# Altium PCB test.PcbDoc
Units mm, origin at the board's own origin, x right, y up, seen from the top; angles counter-clockwise.
Board outline 100 x 80.68 mm, 2 copper layers (Top Layer, Bottom Layer), stack 1.57 mm thick; 99 components, 63 nets, 333 pads, 0 vias.
Unrouted connection lines stored in the file: 212.
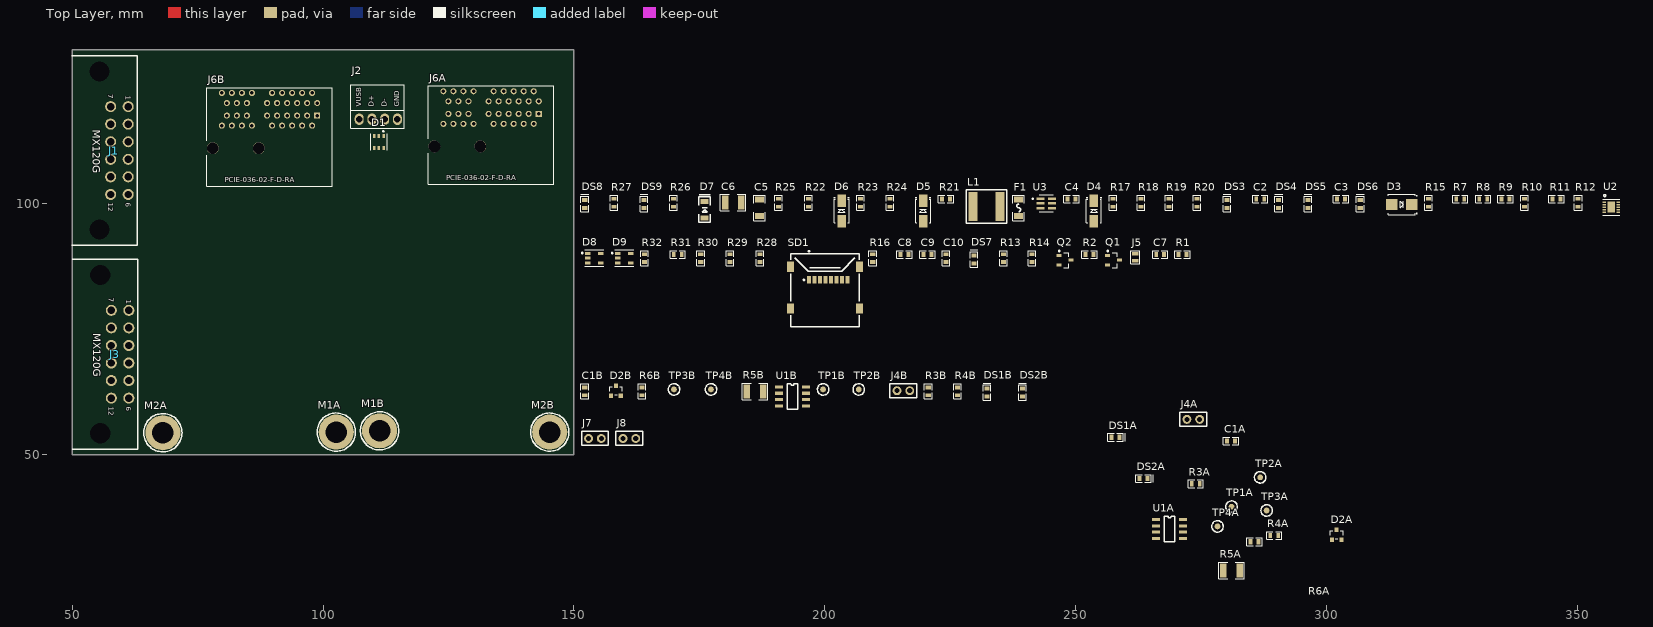
[diagram p0: Top Layer view]
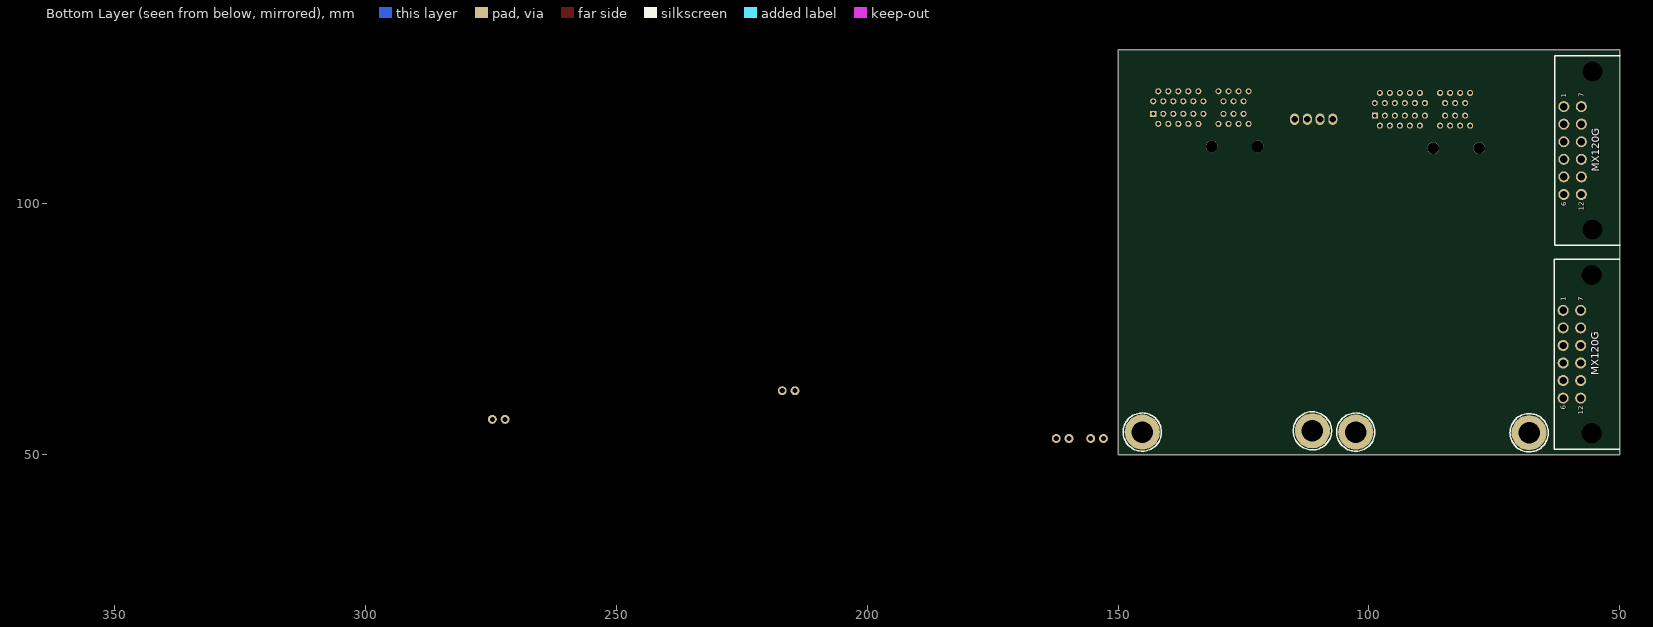
[diagram p1: Bottom Layer view, seen from below]

## Layer stack, top to bottom
Top Solder: solder mask 0.0102, Solder Resist, Dk 3.5
Top Layer: signal copper 0.0356
Dielectric 1: core 1.4986, Core-043, Dk 4.3
Bottom Layer: signal copper 0.0356
Bottom Solder: solder mask 0.0102, Solder Resist, Dk 3.5

## Board outline
50,50 150,50 150,130.683 50,130.683

## Design rules (kind name [scope] priority, off if disabled: settings)
Clearance [All] p1: gap=0.254 ignorepadtopadclearanceinfootprint=FALSE except(0: Arc-Hole Track-Hole SMDPad-Hole THPad-Hole Via-Hole Fill-Hole Poly-Hole Region-Hole Text-Hole)
PolygonConnect [All] p1: connectstyle=Relief reliefconductorwidth=0.254 reliefentries=4 polygonreliefangle="90 Angle" airgapwidth=0.254
RoutingVias [All] p1: holewidth=0.711 width=1.27 viastyle="Through Hole" minholewidth=0.711 minwidth=1.27 maxholewidth=0.711 maxwidth=1.27
SolderMaskExpansion [All] p1: expansion=0.102 istentingtop=FALSE
Width [All] p1: maxlimit=0.254 minlimit=0.254 preferedwidth=0.254
30 further rules are at their usual default settings.

## Classes and differential pairs
channel class RADC-ModuleConnect-S07-V00: "Card Module A" "Card Module B"
channel class RADC-CANBUS-S03-V00: CANBUS1 CANBUS2
component class CANBUS2: C1B D2B DS1B DS2B J4B R3B R4B R5B R6B TP1B TP2B TP3B TP4B U1B
component class CANBUS1: C1A D2A DS1A DS2A J4A R3A R4A R5A R6A TP1A TP2A TP3A TP4A U1A
component class "SD Card / LEDs / Screen": C7 C8 C9 C10 D8 D9 DS7 J5 Q1 Q2 R1 R2 R13 R14 R16 R28 R29 R30 R31 R32 SD1
component class "Power Supply": C2 C3 C4 C5 C6 D3 D4 D5 D6 D7 DS3 DS4 DS5 DS6 DS8 DS9 F1 L1 R7 R8 R9 R10 R11 R12 R15 R17 R18 R19 R20 R21 R22 R23 R24 R25 R26 R27 U2 U3
component class "Card Module B": J6B M1B M2B
component class "Card Module A": J6A M1A M2A
component class Connectors: D1 J1 J2 J3 J7 J8

## Components (designator, comment, footprint, x,y, rotation, side; value= is the part's Value field where it differs from the comment)
C1A "100nF 100V" Cap_Ceramic_0603 280.924,52.705 r0 top (schematic designator C1)
C1B "100nF 100V" Cap_Ceramic_0603 152.146,62.611 r90 top (schematic designator C1)
C2 "4u7" Cap_Ceramic_0603 286.766,100.965 r0 top
C3 "4u7" Cap_Ceramic_0603 302.895,100.965 r0 top
C4 "100nF 50V" Cap_Ceramic_0603 249.174,100.965 r0 top
C5 "22uF 35V" Cap_Ceramic_1206 186.944,99.187 r90 top
C6 "47uF 16V 1210" Cap_Ceramic_1210 181.737,100.203 r0 top
C7 "100nF" Cap_Ceramic_0603 266.827,89.916 r0 top
C8 "4u7" Cap_Ceramic_0603 215.9,89.916 r0 top
C9 "1uF" Cap_Ceramic_0603 220.472,89.916 r0 top
C10 "100nF" Cap_Ceramic_0603 224.155,89.154 r90 top
D1 "PRTR5V0U4D" SC-47 111.125,112.268 r270 top
D2A "NUP2105L" NUP2105L 302.006,34.036 r0 top (schematic designator D2)
D2B "NUP2105L" NUP2105L 158.369,62.738 r0 top (schematic designator D2)
D3 "SMBJ15CA" SMB 314.96,99.822 r0 top
D4 "B260A-13-F" SMA 253.619,98.552 r90 top
D5 "B260A-13-F" SMA 219.583,98.552 r90 top
D6 "B260A-13-F" SMA 203.327,98.552 r90 top
D7 "BZT52B3V3-G3-08" SOD123 176.022,98.806 r90 top
D8 "ESDS314" SOT-23-5 154.051,89.154 r0 top
D9 "ESDS314" SOT-23-5 160.02,89.154 r0 top
DS1A "LED Blue 0603" "LED BLUE 0603" 257.937,53.467 r0 top (schematic designator DS1)
DS1B "LED Blue 0603" "LED BLUE 0603" 232.283,62.357 r90 top (schematic designator DS1)
DS2A "LED Blue 0603" "LED BLUE 0603" 263.525,45.212 r0 top (schematic designator DS2)
DS2B "LED Blue 0603" "LED BLUE 0603" 239.395,62.357 r90 top (schematic designator DS2)
DS3 "LED Green 0603" "LED GREEN 0603" 280.162,99.949 r90 top
DS4 "LED Red 0603" "LED RED 0603" 290.449,99.949 r90 top
DS5 "LED Red 0603" "LED RED 0603" 296.291,99.949 r90 top
DS6 "LED Green 0603" "LED GREEN 0603" 306.705,99.949 r90 top
DS7 "LED Blue 0603" "LED BLUE 0603" 229.743,88.9 r90 top
DS8 "LED Green 0603" "LED GREEN 0603" 152.146,99.949 r90 top
DS9 "LED Green 0603" "LED GREEN 0603" 163.957,99.949 r90 top
F1 "0ZCJ0050FF2G" "1206 Fuse" 238.633,99.187 r90 top
J1 "MX120G" MX120G 61.158,110.604 r270 top
J2 "4PinMaleHeader" USBHEADER-TH 110.998,116.84 r0 top
J3 "MX120G" MX120G 61.285,70.005 r270 top
J4A "Jumper 2Way Pins" Jumper_2Way_Pin 274.701,57.023 r0 top (schematic designator J4)
J4B "Jumper 2Way Pins" Jumper_2Way_Pin 216.916,62.738 r0 top (schematic designator J4)
J5 "Jumper 2Way Solderable" Jumper_2Way_Solderable 261.874,88.646 r0 top
J6A "PCIE-036-02-F-D-RA" PCIE-036-02-F-D-RA 133.477,113.665 r0 top (schematic designator J6)
J6B "PCIE-036-02-F-D-RA" PCIE-036-02-F-D-RA 89.321,113.32 r0 top (schematic designator J6)
J7 "Jumper 2Way Pins" Jumper_2Way_Pin 155.448,53.213 r0 top
J8 "Jumper 2Way Pins" Jumper_2Way_Pin 162.306,53.213 r0 top
L1 "74404064221" Inductor_6x6mm 232.156,99.441 r0 top
M1A "Keystone 24883" "Keystone 24883" 102.616,54.483 r180 top (schematic designator M1)
M1B "Keystone 24883" "Keystone 24883" 111.252,54.737 r180 top (schematic designator M1)
M2A "Keystone 24883" "Keystone 24883" 68.072,54.356 r180 top (schematic designator M2)
M2B "Keystone 24883" "Keystone 24883" 145.161,54.483 r180 top (schematic designator M2)
Q1 "2N7002" SOT23-3 257.556,88.773 r0 top
Q2 "2N7002" SOT23-3 247.904,88.773 r0 top
R1 "100k" Res_ThinFilm_0603 271.272,89.916 r0 top
R2 "220R" Res_ThinFilm_0603 252.73,89.916 r0 top
R3A "1k" Res_ThinFilm_0603 273.926,44.183 r0 top (schematic designator R3)
R3B "1k" Res_ThinFilm_0603 220.599,62.611 r90 top (schematic designator R3)
R4A "1k" Res_ThinFilm_0603 289.56,33.909 r0 top (schematic designator R4)
R4B "1k" Res_ThinFilm_0603 226.441,62.611 r90 top (schematic designator R4)
R5A "120R 1% 1210" Res_ThinFilm_1210 281.051,26.924 r0 top (schematic designator R5)
R5B "120R 1% 1210" Res_ThinFilm_1210 186.055,62.611 r0 top (schematic designator R5)
R6A "10k" Res_ThinFilm_0603 285.623,32.639 r0 top (schematic designator R6)
R6B "10k" Res_ThinFilm_0603 163.576,62.611 r90 top (schematic designator R6)
R7 "4k7" Res_ThinFilm_0603 326.644,100.965 r0 top
R8 "2M2" Res_ThinFilm_0603 331.216,100.965 r0 top
R9 "2M2" Res_ThinFilm_0603 335.661,100.965 r0 top
R10 "4k7" Res_ThinFilm_0603 339.471,100.203 r90 top
R11 "4k7" Res_ThinFilm_0603 345.821,100.965 r0 top
R12 "4k7" Res_ThinFilm_0603 350.139,100.203 r90 top
R13 "1k" Res_ThinFilm_0603 235.585,89.154 r90 top
R14 "10k" Res_ThinFilm_0603 241.3,89.154 r90 top
R15 "220R" Res_ThinFilm_0603 320.294,100.203 r90 top
R16 "220R" Res_ThinFilm_0603 209.55,89.154 r90 top
R17 "390k" Res_ThinFilm_0603 257.429,100.203 r90 top
R18 "220k" Res_ThinFilm_0603 263.017,100.203 r90 top
R19 "1k2" Res_ThinFilm_0603 268.605,100.203 r90 top
R20 "150k" Res_ThinFilm_0603 274.193,100.203 r90 top
R21 "100k" Res_ThinFilm_0603 224.155,100.965 r0 top
R22 "1k" Res_ThinFilm_0603 196.723,100.203 r90 top
R23 "64k9" Res_ThinFilm_0603 207.137,100.203 r90 top
R24 "1k" Res_ThinFilm_0603 212.979,100.203 r90 top
R25 "220R" Res_ThinFilm_0603 190.754,100.203 r90 top
R26 "1k" Res_ThinFilm_0603 169.799,100.203 r90 top
R27 "19k6" Res_ThinFilm_0603 157.988,100.203 r90 top
R28 "220R" Res_ThinFilm_0603 187.071,89.154 r90 top
R29 "220R" Res_ThinFilm_0603 181.102,89.154 r90 top
R30 "220R" Res_ThinFilm_0603 175.26,89.154 r90 top
R31 "220R" Res_ThinFilm_0603 170.688,89.916 r0 top
R32 "220R" Res_ThinFilm_0603 164.084,89.154 r90 top
SD1 "47219-2001" 47219-2001 200.016,83.286 r0 top
TP1A "TestPoint_SMD" TestPointSMD 281.051,39.624 r0 top (schematic designator TP1)
TP1B "TestPoint_SMD" TestPointSMD 199.644,62.992 r90 top (schematic designator TP1)
TP2A "TestPoint_SMD" TestPointSMD 286.766,45.466 r0 top (schematic designator TP2)
TP2B "TestPoint_SMD" TestPointSMD 206.756,62.992 r90 top (schematic designator TP2)
TP3A "TestPoint_SMD" TestPointSMD 288.036,38.862 r0 top (schematic designator TP3)
TP3B "TestPoint_SMD" TestPointSMD 169.926,62.992 r90 top (schematic designator TP3)
TP4A "TestPoint_SMD" TestPointSMD 278.257,35.687 r0 top (schematic designator TP4)
TP4B "TestPoint_SMD" TestPointSMD 177.292,62.992 r90 top (schematic designator TP4)
U1A "SN65HVD233" SN65HVD233DR 268.699,35.181 r0 top (schematic designator U1)
U1B "SN65HVD233" SN65HVD233DR 193.548,61.595 r0 top (schematic designator U1)
U2 "MAX17612A" "10-Pin TDFN EP" 356.743,99.314 r0 top
U3 "LMR14010" LMR14010 244.094,100.076 r0 top

## Footprints (in the part's own frame and the unit in brackets; to place one, negate y for a bottom-side part, rotate by r counter-clockwise, add the part's x,y. Pads: shape width x height; smd on the part's side, far side on the other; paste and mask are expansions set on the pad)
"10-Pin TDFN EP" [mm]
  rect 0.7x0.25 smd: 1(-1.425,1) 2(-1.425,0.5) 3(-1.425,0) 4(-1.425,-0.5) 5(-1.425,-1) 6(1.425,-1) 7(1.425,-0.5) 8(1.425,0) 9(1.425,0.5) 10(1.425,1)
  rect 1.5x2.2 smd paste-0.1: 11(0,0)
  silkscreen extent -1.7,-1.6 1.7,2.5, body extent -1.51,-1.5 1.51,1.5, height 0.76
"1206 Fuse" [mil]
  rect 47x71 smd: 1(-66.08,0) 2(66.08,0)
  silkscreen extent -100,-45 100,45, body extent -67,-33 67,33, height 28
47219-2001 [mm]
  rect 0.8x1.5 smd: 1(-3.205,1.55) 2(-2.105,1.55) 3(-1.005,1.55) 4(0.095,1.55) 5(1.195,1.55) 6(2.295,1.55) 7(3.395,1.55) 8(4.495,1.55)
  rect 1.45x2 smd: 9(6.875,4.15) 10(6.875,-4.15) 11(-6.875,-4.15) 12(-6.875,4.15)
  silkscreen extent -6.8,-7.8 6.8,7.36, body extent -7.3,-7.79 7.3,6.71, height 1.91
Cap_Ceramic_0603 [mil]
  rect 30x40 smd: 1(-31.24,0) 2(31.24,0)
  silkscreen extent -60,-30 60,30, body extent -31,-16 32,16, height 33
Cap_Ceramic_1206 [mil]
  rect 47x71 smd: 1(-66.08,0) 2(66.08,0)
  silkscreen extent -100,-45 100,45, body extent -63,-31 63,32, height 53
Cap_Ceramic_1210 [mm]
  rect 1.3x2.8 smd: 1(-1.625,0) 2(1.625,0)
  silkscreen extent -2.54,-1.65 2.54,1.65, body extent -1.6,-1.25 1.6,1.25, height 1.35
Inductor_6x6mm [mm]
  rect 1.8x5.7 smd: 1(-2.667,0) 2(2.794,0)
  silkscreen extent -3.94,-3.3 4.06,3.3, body extent -3,-3 3,3, height 4.56
Jumper_2Way_Pin [mil]
  round 70 hole 40: 1(-100,0) 2(0,0)
  silkscreen extent -155,-55 55,55, body extent -142,-48 42,47, height 332
Jumper_2Way_Solderable [mil]
  rect 50x30 smd: 1(0,55) 2(0,0)
  silkscreen extent -35,-25 35,80
"Keystone 24883" [mm]
  round 7 hole 4.3: 1(0,0)
  silkscreen extent -3.81,-3.81 3.81,3.81, body extent -2.78,-2.78 2.78,2.78, height 4.02
"LED BLUE 0603" [mil]
  rect 30x40 smd: 1(-31.24,0) 2(31.24,0)
  silkscreen extent -60,-30 75,30, body extent -40,-20 40,20, height 30
"LED GREEN 0603" [mil]
  rect 30x40 smd: 1(-31.24,0) 2(31.24,0)
  silkscreen extent -60,-30 75,30, body extent -40,-20 40,20, height 30
"LED RED 0603" [mil]
  rect 30x40 smd: 1(-31.24,0) 2(31.24,0)
  silkscreen extent -60,-30 75,30, body extent -40,-20 40,20, height 30
LMR14010 [mil]
  rect 65x20 smd: 1(-44.73,36.75) 2(-44.73,-0.65) 3(-44.73,-38.05) 4(45.84,-38.05) 5(45.84,-0.65) 6(45.84,36.75)
  silkscreen extent -110,-68 56,66, body extent -55,-58 56,56, height 43
MX120G [mm]
  round 2.2 hole 1.45: 1(-8.75,0) 2(-5.25,0) 3(-1.75,0) 4(1.75,0) 5(5.25,0) 6(8.75,0) 7(-8.75,-3.5) 8(-5.25,-3.5) 9(-1.75,-3.5) 10(1.75,-3.5) 11(5.25,-3.5) 12(8.75,-3.5)
  round 0 hole 4 mask+0.254: NC(-15.75,-5.7) NC(15.75,-5.7)
  silkscreen extent -18.9,-11.25 18.9,1.8, body extent -18.78,-32.1 18.58,0.36, height 24.48
NUP2105L [mm]
  rect 0.8x0.9 smd: 1(-0.95,-1) 2(0.95,-1) 3(0,1)
  silkscreen extent -1.27,-0.76 1.27,0.76, body extent -1.45,-1.22 1.45,1.18, height 1
PCIE-036-02-F-D-RA [mm]
  rect 1.208x1.208 hole 0.7: A01(9.5,4.25)
  round 1.208 hole 0.7: A02(8.5,2.25) A03(7.5,4.25) A04(6.5,2.25) A05(5.5,4.25) A06(4.5,2.25) A07(3.5,4.25) A08(2.5,2.25) A09(1.5,4.25) A10(0.5,2.25) A11(-0.5,4.25) A12(-3.5,2.25) A13(-4.5,4.25) A14(-5.5,2.25) A15(-6.5,4.25) A16(-7.5,2.25) A17(-8.5,4.25) A18(-9.5,2.25) B01(9.5,6.75) B02(8.5,8.75) B03(7.5,6.75) B04(6.5,8.75) B05(5.5,6.75) B06(4.5,8.75) B07(3.5,6.75) B08(2.5,8.75) B09(1.5,6.75) B10(0.5,8.75) B11(-0.5,6.75) B12(-3.5,8.75) B13(-4.5,6.75) B14(-5.5,8.75) B15(-6.5,6.75) B16(-7.5,8.75) B17(-8.5,6.75) B18(-9.5,8.75)
  round 2.35 hole 2.35 unplated: ""(-11.3,-2.25) ""(-2.15,-2.25)
  silkscreen extent -12.5,-9.8 12.5,9.8, body extent -12.49,-9.78 12.51,9.07, height 9.49
Res_ThinFilm_0603 [mil]
  rect 30x40 smd: 1(-31.24,0) 2(31.24,0)
  silkscreen extent -60,-30 60,30, body extent -31,-16 32,16, height 18
Res_ThinFilm_1210 [mm]
  rect 1.3x2.8 smd: 1(-1.625,0) 2(1.625,0)
  silkscreen extent -2.54,-1.65 2.54,1.65, body extent -1.6,-1.25 1.6,1.25, height 0.6
SC-47 [mm]
  rect 0.8x0.5 smd: 1(-1.2,0.95) 2(-1.2,0) 3(-1.2,-0.95) 4(1.2,-0.95) 5(1.2,0) 6(1.2,0.95)
  silkscreen extent -2.29,-1.65 1.65,1.65, body extent -1.3,-1.45 1.3,1.45, height 1.14
SMA [mm]
  rect 2.5x1.7 smd: A(-2,0) K(2,0)
  silkscreen extent -2.3,-1.52 2.67,1.52, body extent -2.52,-1.46 2.52,1.46, height 2.4
SMB [mm]
  rect 2.26x2.16 smd: A(-2,0) K(2,0)
  silkscreen extent -2.67,-2.01 3.05,2.03, body extent -2.75,-1.95 2.75,1.95, height 2.45
SN65HVD233DR [mm]
  rect 1.55x0.6 smd: 1(-2.7,1.903) 2(-2.7,0.633) 3(-2.7,-0.637) 4(-2.7,-1.907) 5(2.7,-1.907) 6(2.7,-0.637) 7(2.7,0.633) 8(2.7,1.903)
  silkscreen extent -1.04,-2.54 1.04,2.54, body extent -3.01,-2.45 3.01,2.45, height 1.63
SOD123 [mil]
  rect 40x60 smd: A(-65,0) K(65,0)
  silkscreen extent -100,-45 118,45, body extent -74,-33 74,33, height 47
SOT23-3 [mm] "SOT23, 3-Leads, Body 2.90x2.45mm, Pitch 0.95mm, IPC Medium Density"
  rect 1x0.6 smd: D(1.2,0) G(-1.2,0.95) S(-1.2,-0.95)
  silkscreen extent -1.32,-1.5 0.7,1.92, body extent -1.3,-1.5 1.3,1.5, height 1.1
SOT-23-5 [mm]
  rect 1.1x0.6 smd: 1(-1.3,0.95) 2(-1.3,0) 3(-1.3,-0.95) 4(1.3,-0.95) 5(1.3,0.95)
  silkscreen extent -2.54,-1.65 1.91,1.65, body extent -1.4,-1.45 1.4,1.45, height 1
TestPointSMD [mil]
  round 45 smd: 1(0,0)
  silkscreen extent -45,-45 45,45
USBHEADER-TH [mil]
  oval 70x90 hole 50: 1(-150,0) 2(-50,0) 3(50,0) 4(150,0)
  silkscreen extent -215,-70 205,270, body extent -200,-50 200,50, height 341

## Part data
C1A C1B: library part "100nF 100V 5% X7R 0603", "Capacitor, Ceramic, SMD, 100nF, 100V, 5%, X7R, 0603"
C2 C3 C8: library part "4u7 50V 5% X7R 0603", "Capacitor, Ceramic, SMD, 4u7, 50V, 5%, X7R, 0603"
C4 C7 C10: library part "100nF 50V 5% X7R 0603", "Capacitor, Ceramic, SMD, 100nF, 50V, 5%, X7R, 0603"
C5: library part "22uF 35V 20% X5R 1206", "22µF ±20% 35V Ceramic Capacitor X5R 1206 (3216 Metric)", ComponentLink1Description=Digikey, ComponentLink1URL=https://www.digikey.com.au/product-detail/en/tdk-corporation/C3216X5R1V226M160AC/445-8045-1-ND/2792165, ComponentLink2Description=Datasheet, ComponentLink2URL=https://product.tdk.com/info/en/catalog/datasheets/mlcc_commercial_general_en.pdf
C6: library part "47uF 16V 10% X7R 1210", "Capacitor, Ceramic, SMD, 47uF, 16V, 5%, X7R, 1210"
C9: library part "1uF 25V 5% X7R 0603", "Capacitor, Ceramic, SMD, 1uF, 25V, 5%, X7R, 0603"
D1: "Clamp Ipp Tvs Diode Surface Mount 6-TSOP"
D3: "Diode, SMD, TVS Diode, 15V 24.4V, DO214AA/SMB", ComponentLink1Description=Digikey, ComponentLink1URL=https://www.digikey.com.au/product-detail/en/littelfuse-inc/SMBJ15CA/SMBJ15CALFCT-ND/285983, ComponentLink2Description=Datasheet, ComponentLink2URL=https://www.littelfuse.com/~/media/electronics/datasheets/tvs_diodes/littelfuse_tvs_diode_smbj_datasheet.pdf.pdf
D4 D5 D6: "Diode, Schottky Barrier Rectifier, 60 V, 2 A, B260A-13-F"
D7: "Diode, SMD, Zenner, 3.3V, 2%, 410mW, SOD-123", ComponentLink1Description=Digikey, ComponentLink1URL=https://www.digikey.com.au/product-detail/en/vishay-semiconductor-diodes-division/BZT52B3V3-G3-08/BZT52B3V3-G3-08GICT-ND/8284035, ComponentLink2Description=Datasheet, ComponentLink2URL=https://www.vishay.com/docs/83340/bzt52g.pdf
D8 D9: "6.5V (Typ) Clamp 25A (8/20µs) Ipp Tvs Diode Surface Mount SOT-23-5"
DS1A DS1B DS2A DS2B: library part "LED BLUE 0603"
F1: "Polymeric PTC Resettable Fuse 8V 500mA Ih Surface Mount 1206 (3216 Metric), Concave"
J1 J3: "MX120G with standard connector layout"
J2: library part USBHeader-TH
J4A J4B: library part "Jumper 2Way Side Pins", "Jumper 2Way Side Pins"
J5: library part "Jumper 2Way Vert Solderable", "Jumper 2Way Vert Solderable"
J6A J6B: "36 Position Female Connector PCI Express™ Gold 0.039\" (1.00mm) Black"
J7 J8: library part "Jumper 2Way Vert Pins", "Jumper 2Way Vert Pins"
L1: "FIXED IND 220UH 660MA 850 MOHM", ComponentLink1Description=Digikey, ComponentLink1URL=https://www.digikey.com.au/product-detail/en/w%C3%BCrth-elektronik/74404064221/732-7261-1-ND/5353241, ComponentLink2Description="LCSC A", ComponentLink2URL=https://lcsc.com/product-detail/Power-Inductors_Sunlord-SWPA6045S221MT_C91047.html, ComponentLink3Description="LCSC B", ComponentLink3URL=https://lcsc.com/product-detail/Power-Inductors_SXN-Shun-Xiang-Nuo-Elec-SMNR6045-221MT_C467145.html
M1A M1B M2A M2B: "Round Standoff Threaded M3x0.5 Steel 0.160\" (4.06mm)"
R1 R21: library part "100k 5%, 0603", "Resistor, SMD, 100k, 0.1W, 5%, 0603"
R2 R15 R16 R25 R28 R29 R30 R31 R32: library part "220R 5% 0603", "Resistor, SMD, 220R, 0.1W, 5%, 0603"
R3A R3B R4A R4B R13 R22 R24 R26: library part "1k 5% 0603", "Resistor, SMD, 1k, 0.1W, 5%, 0603"
R5A R5B: "Resistor, SMD, 120R, 0.25W, 1%, 1210"
R6A R6B R14: library part "10k 5% 0603", "Resistor, SMD, 10k, 0.1W, 5%, 0603"
R7 R10 R11 R12: library part "4k7 5% 0603", "Resistor, SMD, 4k7, 0.1W, 5%, 0603"
R8 R9: library part "2M2 5% 0603", "Resistor, SMD, 2M2, 0.1W, 5%, 0603"
R17: library part "390k 5% 0603", "Resistor, SMD, 390k, 0.1W, 5%, 0603"
R18: library part "220k 5% 0603", "Resistor, SMD, 220k, 0.1W, 5%, 0603"
R19: library part "1k2 5% 0603", "Resistor, SMD, 1k2, 0.1W, 5%, 0603"
R20: library part "150k 5%, 0603", "Resistor, SMD, 150k, 0.1W, 5%, 0603"
R23: library part "64k9 1% 0603", "Resistor, SMD, 64k9, 0.1W, 5%, 0603"
R27: library part "19k6 1% 0603", "Resistor, SMD, 19k6, 0.1W, 5%, 0603"
SD1: "MicroSD Card Connector, Hinge Type, -40 to 85 degC, 8-Pin SMD, RoHS, Tape and Reel"
U2: "Overvoltage, Undervoltage Protection PMIC 10-TDFN-EP (3x3)"
D2A D2B: ComponentLink1Description=Datasheet, ComponentLink1URL=https://www.onsemi.cn/PowerSolutions/document/NUP2105L-D.PDF, ComponentLink2Description=LCSC, ComponentLink2URL=https://lcsc.com/product-detail/TVS_ON-Semiconductor-NUP2105LT1G_C14486.html, ComponentLink3Description=Digikey, ComponentLink3URL=https://www.digikey.com.au/product-detail/en/on-semiconductor/SZNUP2105LT1G/SZNUP2105LT1GOSCT-ND/3487669
U1A U1B: ComponentLink1Description=LCSC, ComponentLink1URL=https://lcsc.com/product-detail/CAN-ICs_Texas-Instruments_SN65HVD233DRG4_Texas-Instruments-Texas-Instruments-SN65HVD233DRG4_C61643.html, ComponentLink2Description=Digikey, ComponentLink2URL=https://www.digikey.com.au/product-detail/en/texas-instruments/SN65HVD233DR/296-35967-1-ND/4134960, ComponentLink3Description=Datasheet, ComponentLink3URL=https://www.ti.com/lit/ds/symlink/sn65hvd233.pdf?ts=1588560888178, ComponentLink4Description="Ti Product Page", ComponentLink4URL=https://www.ti.com/product/SN65HVD233

## Nets (pads, with @x,y where several pads share a name; then routed paths per layer and width w, separated by ;. In a path a pad name is that pad's centre, name@x,y a point inside that pad or via, vN(x,y) a via of type N, cw(c..) or ccw(c..) an arc to the next point about the centre after c; other vN are vias at no path point)
3V3: C1A.2 C1B.2 C6.2 C7.2 DS1A.1 DS1B.1 DS2A.1 DS2B.1 J5.1 J6A.B01 J6A.B05 J6A.B11 J6A.B12 J6A.B18 J6B.B01 J6B.B05 J6B.B11 J6B.B12 J6B.B18 L1.2 Q1.D R1.1 R23.2 R24.2 U1A.3 U1B.3
3V3SD: C8.2 C9.2 C10.2 D8.1 D8.3 J5.2 Q1.S SD1.4
12V: C2.2 D3.A J1.4 J1.5 J1.10 J1.11 J3.4 J3.5 J3.10 J3.11 R7.2 R8.2 R9.2 R10.2 R11.2 U2.1
12VP: C3.2 D6.A R12.2 U2.10
CAN1H: D2B.2 J1.2 J3.2 J4B.1 J7.1 TP1B.1 U1B.7
CAN1L: D2B.1 J1.1 J3.1 J8.1 R5B.1 TP3B.1 U1B.6
CAN2H: D2A.2 J1.8 J3.8 J4A.1 J7.2 TP1A.1 U1A.7
CAN2L: D2A.1 J1.7 J3.7 J8.2 R5A.1 TP3A.1 U1A.6
"CAN LBKA": R6A.2 U1A.5
"CAN LBKB": R6B.2 U1B.5
"CAN RESA": J4A.2 R5A.2
"CAN RESB": J4B.2 R5B.2
"CAN RX LEDA": DS2A.2 R4A.2
"CAN RX LEDB": DS2B.2 R4B.2
"CAN RXA": R4A.1 TP4A.1 U1A.4
"CAN RXB": R4B.1 TP4B.1 U1B.4
"CAN TX LEDA": DS1A.2 R3A.2
"CAN TX LEDB": DS1B.2 R3B.2
"CAN TXA": R3A.1 TP2A.1 U1A.1
"CAN TXB": R3B.1 TP2B.1 U1B.1
GND: C1A.1 C1B.1 C2.1 C3.1 C5.1 C6.1 C7.1 C8.1 C9.1 C10.1 D1.2 D2A.3 D2B.3 D3.K D5.A D7.A D8.2 D9.2 DS3.2 DS6.2 DS7.2 DS8.2 DS9.2 J1.3 J1.6 J1.9 J1.12 J2.4 J3.3 J3.6 J3.9 J3.12 J6A.A01 J6A.A06 J6A.A11 J6A.A12 J6A.A18 J6B.A01 J6B.A06 J6B.A11 J6B.A12 J6B.A18 M1A.1 M1B.1 M2A.1 M2B.1 Q2.S R6A.1 R6B.1 R14.1 R17.1 R18.1 R19.1 R20.1 R26.1 R27.1 SD1.6 SD1.9 SD1.10 SD1.11 SD1.12 U1A.2 U1A.8 U1B.2 U1B.8 U2.9 U2.11 U3.2
NetD7_K: D7.K R21.1 R25.1 R26.2
NetDS7_1: DS7.1 R13.1
NetDS8_1: DS8.1 R22.1
NetDS9_1: DS9.1 R24.1
NetR15_2: R15.2
NetR25_2: R25.2
"PWR CB 3V3": C4.1 U3.1
"PWR CLMODE": R20.2 U2.4
"PWR EN 12V": R15.1 U2.5
"PWR FB 3V3": R23.1 R27.2 U3.3
"PWR FLAG": DS5.2 U2.6
"PWR LED 12V": DS3.1 R7.1
"PWR LED 12VP": DS6.1 R12.1
"PWR LED FLAG": DS5.1 R11.1
"PWR LED UVOV": DS4.1 R10.1
"PWR OVLO": R9.1 R18.2 U2.3
"PWR SETI": R19.2 U2.8
"PWR SW 3V3": C4.2 D5.K L1.1 U3.6
"PWR UVLO": R8.1 R17.2 U2.2
"PWR UVOV": DS4.2 U2.7
RTC: J6A.B02 J6B.B02
"SD CLK": R30.1
"SD CLK P": D9.3 R30.2 SD1.5
"SD CMD": R29.1
"SD CMD P": D9.1 R29.2 SD1.3
"SD DAT0": R31.1
"SD DAT0 P": D9.4 R31.2 SD1.7
"SD DAT1": R32.1
"SD DAT1 P": D9.5 R32.2 SD1.8
"SD DAT2": R16.1
"SD DAT2 P": D8.4 R16.2 SD1.1
"SD DAT3": R28.1
"SD DAT3 P": D8.5 R28.2 SD1.2
"SD RST": R2.1 R13.2
"SD RST R": Q2.G R2.2 R14.2
"SD RST SIG": Q1.G Q2.D R1.2
"USB D_N": D1.1 D1.6 J2.3
"USB D_P": D1.3 D1.4 J2.2
VBUS: D1.5
VCC: C5.2 D4.K D6.K R21.2 U3.4 U3.5
VUSB: F1.1 J2.1 R22.2
VUSBF: D4.A F1.2
pads on no net: J1.NC J3.NC J6A. J6A.A02 J6A.A03 J6A.A04 J6A.A05 J6A.A07 J6A.A08 J6A.A09 J6A.A10 J6A.A13 J6A.A14 J6A.A15 J6A.A16 J6A.A17 J6A.B03 J6A.B04 J6A.B06 J6A.B07 J6A.B08 J6A.B09 J6A.B10 J6A.B13 J6A.B14 J6A.B15 J6A.B16 J6A.B17 J6B. J6B.A02 J6B.A03 J6B.A04 J6B.A05 J6B.A07 J6B.A08 J6B.A09 J6B.A10 J6B.A13 J6B.A14 J6B.A15 J6B.A16 J6B.A17 J6B.B03 J6B.B04 J6B.B06 J6B.B07 J6B.B08 J6B.B09 J6B.B10 J6B.B13 J6B.B14 J6B.B15 J6B.B16 J6B.B17

## Silkscreen, mask and mechanical layers (free items; w line width, h text height)
Mechanical 1:
  lines w0.254: 65.283,51.506 71.083,51.506 71.083,57.306 65.993,57.306 65.283,57.306 65.283,51.506 ; 65.283,51.506 105.283,51.506 ; 65.283,51.506 65.283,111.506 76.971,111.506 105.283,111.506 105.283,51.506 ; 105.283,51.506 105.283,57.306 100.193,57.306 99.483,57.306 99.483,51.506 105.283,51.506 ; 108.073,51.505 113.873,51.505 113.873,57.305 108.783,57.305 108.073,57.305 108.073,51.505 ; 108.073,51.505 108.073,111.505 119.761,111.505 148.073,111.505 148.073,51.505 ; 108.073,51.505 148.073,51.505 ; 148.073,51.505 148.073,57.305 142.983,57.305 142.273,57.305 142.273,51.505 148.073,51.505 ; 50,50 150,50 150,130.683 50,130.683 50,50 ; 74.055,60.945 96.055,60.945 96.055,94.945 74.055,94.945 74.055,60.945 ; 119.977,66.966 125.095,66.966 136.977,66.966 136.977,88.966 119.977,88.966 119.977,83.966 119.977,66.966
  text "XBEE" at 84.455,80.645 h1.52 r270
  text "GPS" at 130.048,78.486 h1.52 r180

## Text inside footprints (layer, text, board x,y; h text height)
J1: Top Overlay "1" at 60.66,121.494 h1.02 r270; Top Overlay "7" at 57.16,121.833 h1.02 r270; Top Overlay "12" at 57.16,100.152 h1.02 r270; Top Overlay "6" at 60.66,100.152 h1.02 r270; Bottom Overlay "7" at 57.16,121.172 h1.02 r270; Bottom Overlay "1" at 60.661,121.162 h1.02 r270; Bottom Overlay "12" at 57.16,98.559 h1.02 r270; Bottom Overlay "6" at 60.661,99.507 h1.02 r270
J2: Top Overlay "GND" at 115.189,119.278 h1.02 r90; Top Overlay "D-" at 112.649,119.278 h1.02 r90; Top Overlay "D+" at 110.109,119.278 h1.02 r90; Top Overlay "VUSB" at 107.569,119.278 h1.02 r90
J3: Top Overlay "1" at 60.787,80.895 h1.02 r270; Top Overlay "7" at 57.287,81.234 h1.02 r270; Top Overlay "12" at 57.287,59.553 h1.02 r270; Top Overlay "6" at 60.787,59.553 h1.02 r270; Bottom Overlay "7" at 57.287,80.573 h1.02 r270; Bottom Overlay "1" at 60.788,80.563 h1.02 r270; Bottom Overlay "12" at 57.287,57.96 h1.02 r270; Bottom Overlay "6" at 60.788,58.908 h1.02 r270